# Altium PCB MainBoard.PcbDoc
Units mm, origin at the board's own origin, x right, y up, seen from the top; angles counter-clockwise.
Board outline 90.17 x 83.69 mm, 2 copper layers (Top Layer, Bottom Layer); 19 components, 13 nets, 156 pads, 8 vias.
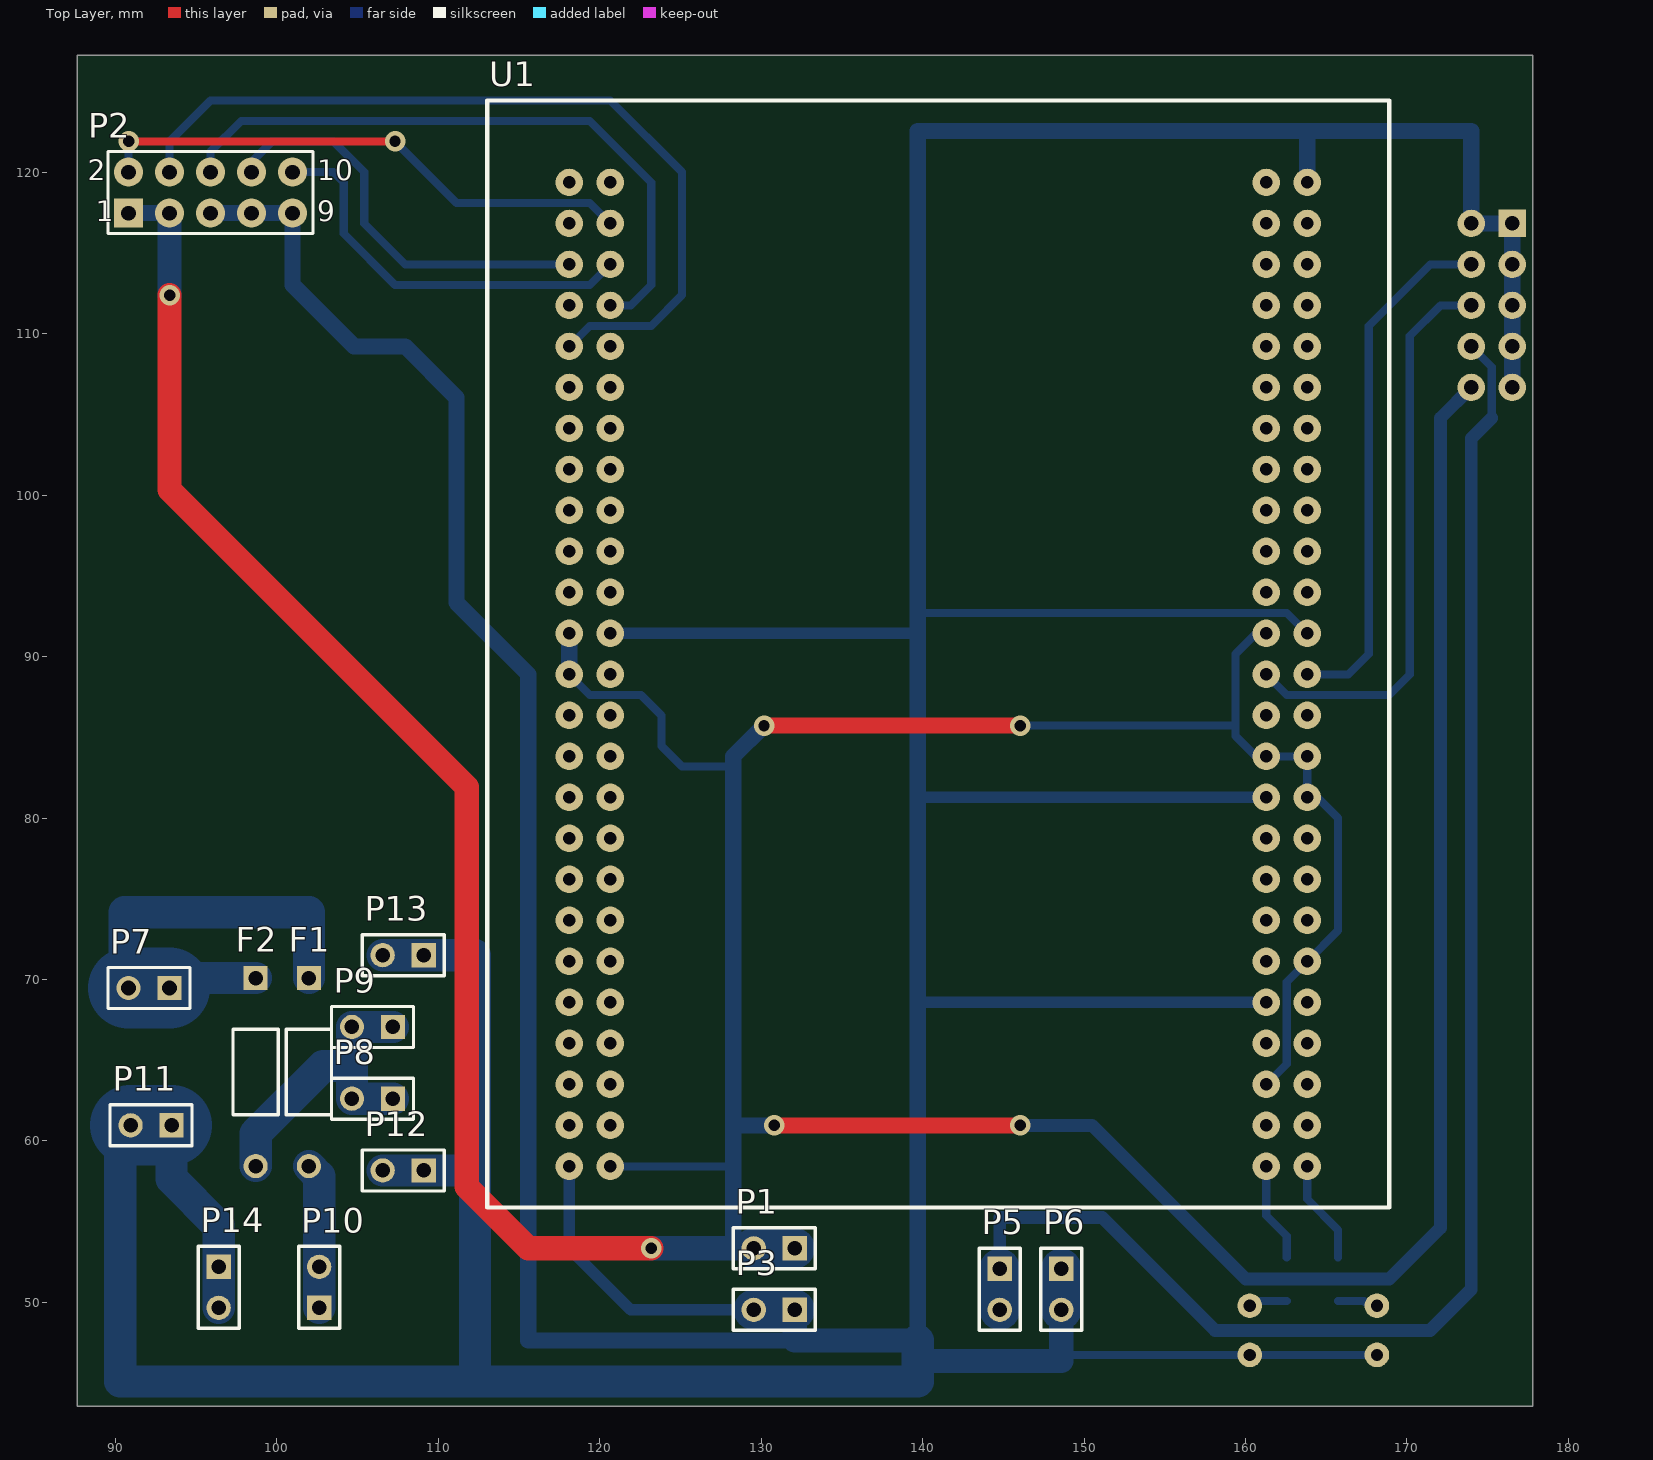
[diagram p0: Top Layer view]
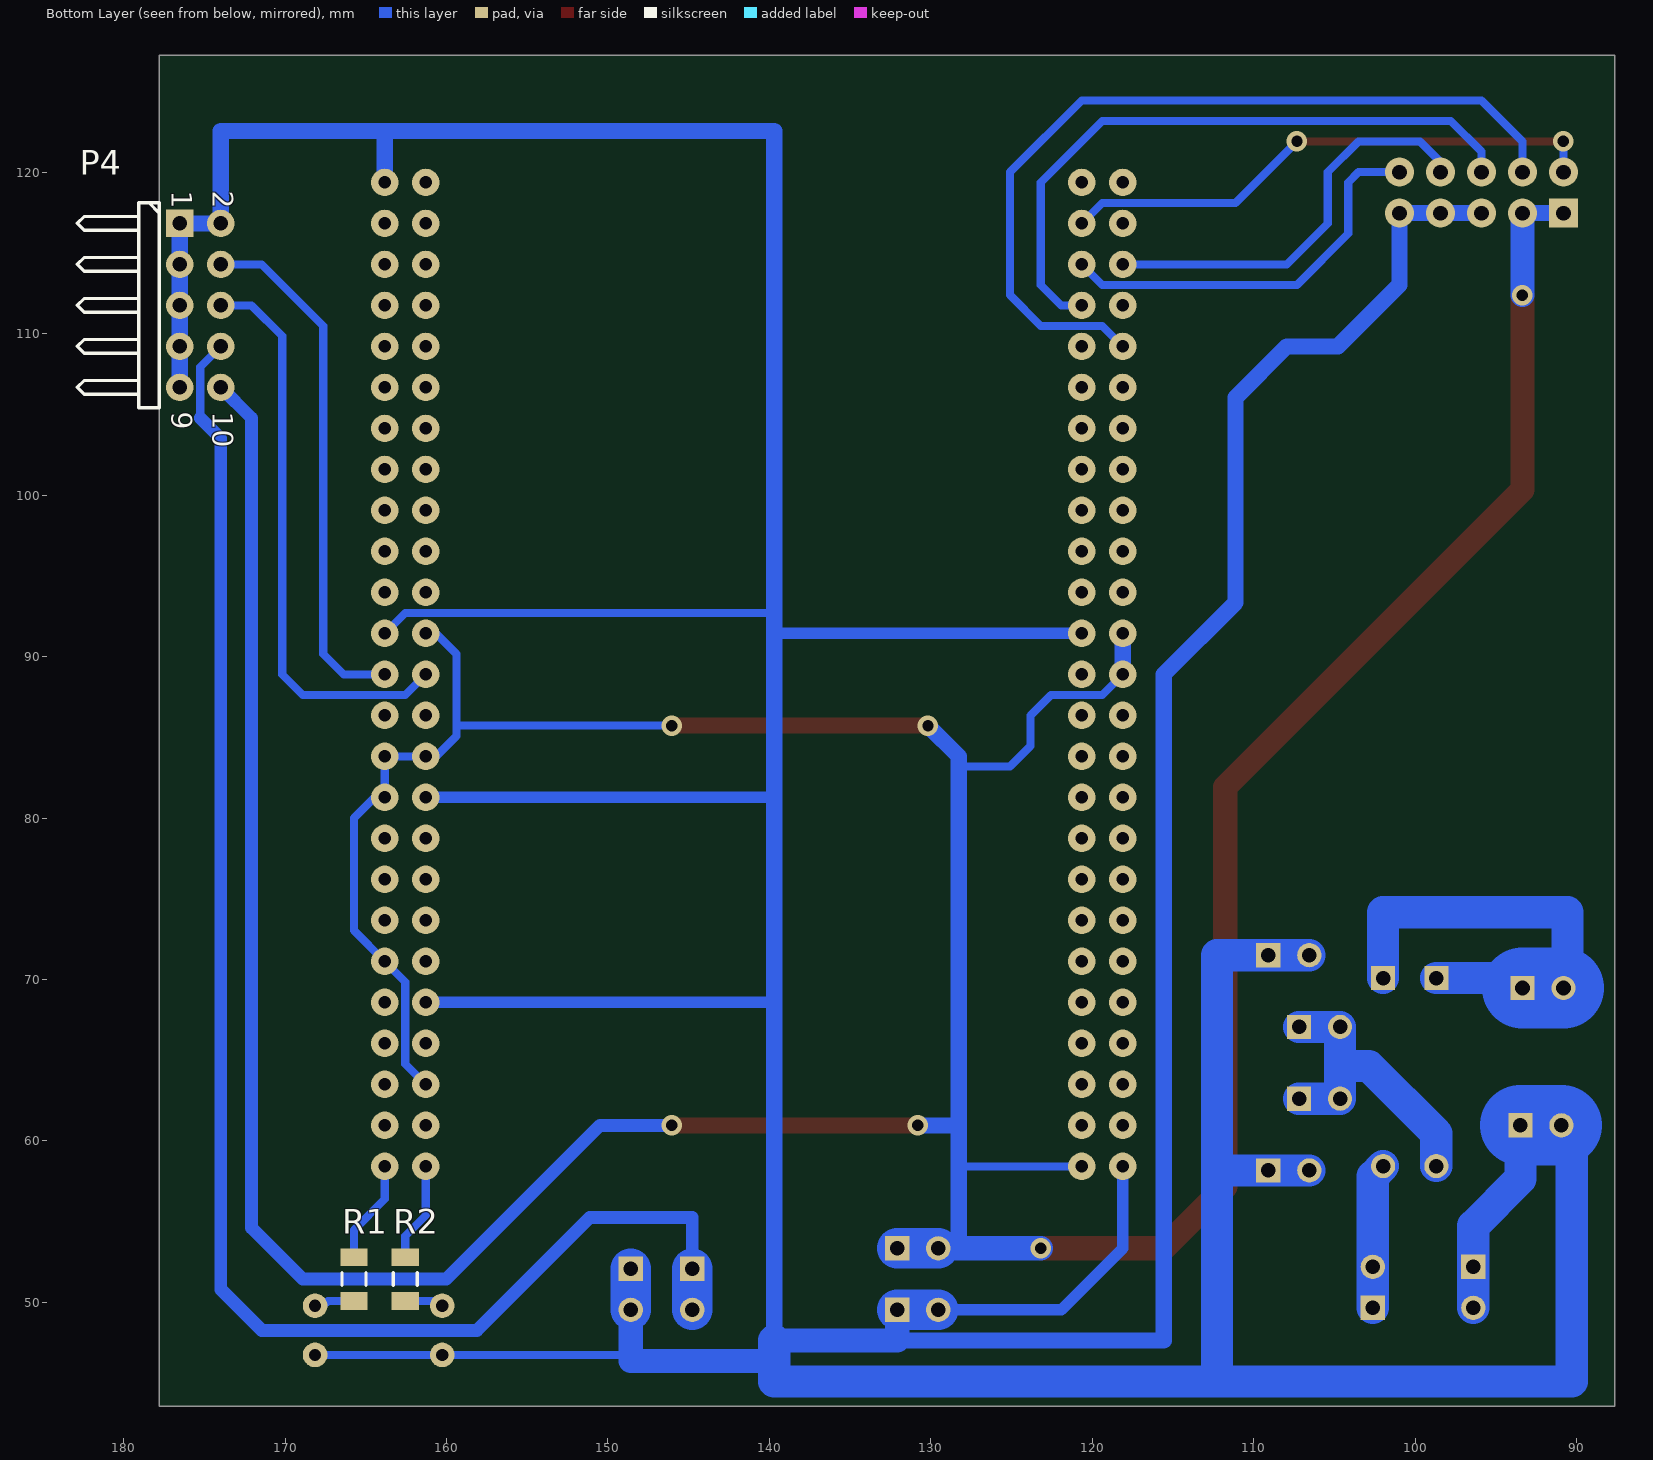
[diagram p1: Bottom Layer view, seen from below]

## Layer stack, top to bottom
Top Solder: solder mask 0.0102, Solder Resist, Dk 3.5
Top Layer: signal copper 0.0356
Dielectric 1: dielectric 0.32, FR-4, Dk 4.8
Bottom Layer: signal copper 0.0356
Bottom Solder: solder mask 0.0102, Solder Resist, Dk 3.5

## Board outline
87.63,43.561 177.8,43.561 177.8,127.25 87.634,127.25 87.63,127.254

## Design rules (kind name [scope] priority, off if disabled: settings)
Clearance Clearance_1 [All] p1: gap=0
Clearance [All vs InNet('GND')] p2: gap=1
ComponentClearance [All] p1: gap=0 collisioncheckmode=3 verticalgap=0 showdistances=FALSE
PolygonConnect [All] p1: connectstyle=Relief reliefconductorwidth=0.254 reliefentries=4 polygonreliefangle="90 Angle" airgapwidth=0.254
RoutingVias [All] p1: holewidth=0.711 width=1.27 viastyle="Through Hole" minholewidth=0.711 minwidth=1.27 maxholewidth=0.711 maxwidth=1.27
SolderMaskExpansion [All] p1: expansion=0.102
Width [All] p1: maxlimit=2539.975 minlimit=0.003 preferedwidth=0.254
29 further rules are at their usual default settings.

## Classes and differential pairs
component class MainBoard: F1 F2 P1 P2 P3 P4 P5 P6 P7 P8 P9 P10 P11 P12 P13 P14 U1

## Components (designator, comment, footprint, x,y, rotation, side; value= is the part's Value field where it differs from the comment)
F1 "Fuse 2" PIN-W2/E2.8 101.981,64.262 r270 top
F2 "Fuse 2" PIN-W2/E2.8 98.679,64.262 r270 top
P1 "Header 2" HDR1X2 132.08,53.34 r180 top
P2 "Header 5X2" HDR2X5 90.805,117.475 r0 top
P3 "Header 2" HDR1X2 132.08,49.53 r180 top
P4 "Header 5X2H" HDR2X5H 176.53,116.84 r270 bottom
P5 "Header 2" HDR1X2 144.78,52.07 r270 top
P6 "Header 2" HDR1X2 148.59,52.07 r270 top
P7 "Header 2" HDR1X2 93.345,69.469 r180 top
P8 "Header 2" HDR1X2 107.188,62.611 r180 top
P9 "Header 2" HDR1X2 107.188,67.056 r180 top
P10 "Header 2" HDR1X2 102.616,49.657 r90 top
P11 "Header 2" HDR1X2 93.472,60.96 r180 top
P12 "Header 2" HDR1X2 109.093,58.166 r180 top
P13 "Header 2" HDR1X2 109.093,71.501 r180 top
P14 "Header 2" HDR1X2 96.393,52.197 r270 top
R1 "Comment" C1206 165.735,51.435 r270 bottom
R2 "Comment" C1206 162.56,51.435 r270 bottom
U1 "STM32F207VCT6_Module" STM32F207VCT6_Module 140.97,88.9 r0 top

## Footprints (in the part's own frame and the unit in brackets; to place one, negate y for a bottom-side part, rotate by r counter-clockwise, add the part's x,y. Pads: shape width x height; smd on the part's side, far side on the other; paste and mask are expansions set on the pad)
C1206 [mm] "Chip Capacitor, Body 3.2x1.6mm, IPC High Density"
  rect 1.1x1.7 smd: 1(-1.35,0) 2(1.35,0)
  silkscreen extent -0.4,-0.75 0.4,0.75, body extent -1.7,-0.9 1.7,0.9, height 1.3
HDR1X2 [mm] "Connector; Header; 2 Position"
  rect 1.5x1.5 hole 0.9: 1(0,0)
  round 1.5 hole 0.9: 2(2.54,0)
  silkscreen extent -1.27,-1.27 3.81,1.27
HDR2X5 [mm] "Connector; Header; 5x2 Position"
  rect 1.8x1.8 hole 0.9: 1(0,0)
  round 1.8 hole 0.9: 2(0,2.54) 3(2.54,0) 4(2.54,2.54) 5(5.08,0) 6(5.08,2.54) 7(7.62,0) 8(7.62,2.54) 9(10.16,0) 10(10.16,2.54)
  silkscreen extent -1.27,-1.27 11.43,3.81
HDR2X5H [mm] "Connector; Header; 5x2 Position; Right Angle"
  rect 1.7x1.7 hole 0.9: 1(0,0)
  round 1.7 hole 0.9: 2(0,2.54) 3(2.54,0) 4(2.54,2.54) 5(5.08,0) 6(5.08,2.54) 7(7.62,0) 8(7.62,2.54) 9(10.16,0) 10(10.16,2.54)
  silkscreen extent -1.27,-6.35 11.43,-1.27
PIN-W2/E2.8 [mm] "Thru-Hole; 2 Leads"
  rect 1.5x1.5 hole 0.9: 1(-5.825,0)
  round 1.5 hole 0.9: 2(5.825,0)
  silkscreen extent -2.65,-1.4 2.65,1.4
STM32F207VCT6_Module [mm]
  round 1.7 hole 0.762: 1(-22.86,30.48) 2(-20.32,30.48) 3(-22.86,27.94) 4(-20.32,27.94) 5(-22.86,25.4) 6(-20.32,25.4) 7(-22.86,22.86) 8(-20.32,22.86) 9(-22.86,20.32) 10(-20.32,20.32) 11(-22.86,17.78) 12(-20.32,17.78) 13(-22.86,15.24) 14(-20.32,15.24) 15(-22.86,12.7) 16(-20.32,12.7) 17(-22.86,10.16) 18(-20.32,10.16) 19(-22.86,7.62) 20(-20.32,7.62) 21(-22.86,5.08) 22(-20.32,5.08) 23(-22.86,2.54) 24(-20.32,2.54) 25(-22.86,0) 26(-20.32,0) 27(-22.86,-2.54) 28(-20.32,-2.54) 29(-22.86,-5.08) 30(-20.32,-5.08) 31(-22.86,-7.62) 32(-20.32,-7.62) 33(-22.86,-10.16) 34(-20.32,-10.16) 35(-22.86,-12.7) 36(-20.32,-12.7) 37(-22.86,-15.24) 38(-20.32,-15.24) 39(-22.86,-17.78) 40(-20.32,-17.78) 41(-22.86,-20.32) 42(-20.32,-20.32) 43(-22.86,-22.86) 44(-20.32,-22.86) 45(-22.86,-25.4) 46(-20.32,-25.4) 47(-22.86,-27.94) 48(-20.32,-27.94) 49(-22.86,-30.48) 50(-20.32,-30.48) 51(20.32,30.48) 52(22.86,30.48) 53(20.32,27.94) 54(22.86,27.94) 55(20.32,25.4) 56(22.86,25.4) 57(20.32,22.86) 58(22.86,22.86) 59(20.32,20.32) 60(22.86,20.32) 61(20.32,17.78) 62(22.86,17.78) 63(20.32,15.24) 64(22.86,15.24) 65(20.32,12.7) 66(22.86,12.7) 67(20.32,10.16) 68(22.86,10.16) 69(20.32,7.62) 70(22.86,7.62) 71(20.32,5.08) 72(22.86,5.08) 73(20.32,2.54) 74(22.86,2.54) 75(20.32,0) 76(22.86,0) 77(20.32,-2.54) 78(22.86,-2.54) 79(20.32,-5.08) 80(22.86,-5.08) 81(20.32,-7.62) 82(22.86,-7.62) 83(20.32,-10.16) 84(22.86,-10.16) 85(20.32,-12.7) 86(22.86,-12.7) 87(20.32,-15.24) 88(22.86,-15.24) 89(20.32,-17.78) 90(22.86,-17.78) 91(20.32,-20.32) 92(22.86,-20.32) 93(20.32,-22.86) 94(22.86,-22.86) 95(20.32,-25.4) 96(22.86,-25.4) 97(20.32,-27.94) 98(22.86,-27.94) 99(20.32,-30.48) 100(22.86,-30.48)
  silkscreen extent -27.94,-33.02 27.94,35.56

## Part data
F1 F2: "Fuse"
P1 P3 P5 P6 P7 P8 P9 P10 P11 P12 P13 P14: "Header, 2-Pin"
P2: "Header, 5-Pin, Dual row"
P4: "Header, 5-Pin, Dual row, Right Angle"

## Free pads (board coordinates)
  round 1.524 hole 0.762: 0(160.274,46.736) 0(160.274,49.784) 1(168.148,46.736) 1(168.148,49.784)

## Via types
v1: diameter 1.27, hole 0.711, Top Layer to Bottom Layer, 8 vias

## Nets (pads, with @x,y where several pads share a name; then routed paths per layer and width w, separated by ;. In a path a pad name is that pad's centre, name@x,y a point inside that pad or via, vN(x,y) a via of type N, cw(c..) or ccw(c..) an arc to the next point about the centre after c; other vN are vias at no path point)
3.3V: P1.1 P1.2 P2.1 P2.3 P4.10 U1.23 U1.25 U1.50 U1.73 U1.79 U1.80 U1.82 U1.90 U1.95 | length 316.3
  Top Layer w1: v1(130.175,85.725) v1(146.05,85.725) ; v1(130.81,60.96) v1(146.05,60.96)
  Top Layer w1.5: v1(93.345,112.395) 93.345,100.33 111.76,81.915 111.76,57.15 115.57,53.34 v1(123.19,53.34)
  Bottom Layer w0.5: U1.25 119.38,87.63 122.555,87.63 123.825,86.36 123.825,84.455 125.095,83.185 128.27,83.185 ; U1.50 128.27,58.42 ; v1(146.05,85.725) 159.385,85.725 ; U1.95 162.56,64.77 162.56,69.85 U1.90 165.735,73.025 165.735,80.01 164.465,81.28 U1.82 U1.80 U1.79 160.655,83.82 159.385,85.09 159.385,85.725 ; U1.73 160.655,91.44 159.385,90.17 159.385,85.725
  Bottom Layer w0.8: v1(146.05,60.96) 150.495,60.96 160.02,51.435 168.91,51.435 172.085,54.61 172.085,104.775 P4.10
  Bottom Layer w1: P2.1 P2.3 ; U1.25 U1.23 ; 128.27,53.34 128.27,58.42 128.27,60.96 ; v1(130.175,85.725) 128.27,83.82 128.27,83.185 128.27,60.96 ; v1(130.81,60.96) 128.27,60.96
  Bottom Layer w1.5: v1(93.345,112.395) P2.3 ; v1(123.19,53.34) 128.27,53.34 P1.2
  Bottom Layer w2.5: P1.2 P1.1
5V: P4.8 P5.1 P5.2 | length 98.3
  Bottom Layer w0.5: P4.8 175.26,107.95 175.26,104.775
  Bottom Layer w0.8: P5.1 144.78,55.245 151.13,55.245 158.115,48.26 171.45,48.26 173.99,50.8 173.99,103.505 175.26,104.775
  Bottom Layer w2.5: P5.2 P5.1
GND: P2.5 P2.7 P2.9 P3.1 P3.2 P4.1 P4.2 P4.3 P4.5 P4.7 P4.9 P6.1 P6.2 P11.1 P11.2 P12.1 P12.2 P13.1 P13.2 P14.1 P14.2 pad.0@160.274,46.736 pad.1@168.148,46.736 U1.24 U1.49 U1.52 U1.74 U1.81 U1.91 | length 502.4
  Bottom Layer w0.5: 139.7,92.71 162.56,92.71 U1.74 ; 148.59,46.736 160.274,46.736 pad.1@168.148,46.736
  Bottom Layer w0.7: U1.49 118.11,53.34 121.92,49.53 P3.2 ; U1.24 139.7,91.44 ; 139.7,68.834 139.954,68.58 U1.91 ; 139.7,81.28 U1.81
  Bottom Layer w1: P2.5 P2.7 P2.9 100.965,113.03 104.775,109.22 107.95,109.22 111.125,106.045 111.125,93.345 115.57,88.9 115.57,47.625 132.08,47.625 ; 139.7,47.625 139.7,68.834 139.7,81.28 139.7,91.44 139.7,92.71 139.7,122.555 163.83,122.555 ; U1.52 163.83,122.555 ; P4.9 P4.7 P4.5 P4.3 P4.1 P4.2 173.99,122.555 163.83,122.555
  Bottom Layer w1.5: P3.1 132.08,47.625 139.7,47.625 ; 139.7,46.355 148.59,46.355 P6.2
  Bottom Layer w2: P11.2 90.297,60.325 90.297,45.085 112.268,45.085 ; P11.1 93.472,57.658 96.393,54.737 P14.1 P14.2 ; P12.2 P12.1 112.268,58.166 ; P13.2 P13.1 112.268,71.501 112.268,58.166 ; 139.7,47.625 139.7,46.355 139.7,45.085 112.268,45.085 ; 112.268,45.085 112.268,58.166
  Bottom Layer w2.5: P3.2 P3.1 ; P6.2 P6.1
  Bottom Layer w5: P11.2 P11.1
NetF1_2: F1.2 P10.1 P10.2 | length 9
  Bottom Layer w2: F1.2 102.616,57.802 P10.2 P10.1
NetF2_2: F2.2 P8.1 P8.2 P9.1 P9.2 | length 19.2
  Bottom Layer w2: F2.2 98.679,60.452 102.87,64.643 104.648,64.643 ; P8.1 P8.2 104.648,64.643 ; P9.1 P9.2 104.648,64.643
TO_SERVO_RX: P4.4 U1.76 | length 32.6
  Bottom Layer w0.5: U1.76 166.37,88.9 167.64,90.17 167.64,110.49 171.45,114.3 P4.4
TO_SERVO_TX: P4.6 U1.75 | length 35.5
  Bottom Layer w0.5: U1.75 162.56,87.63 168.91,87.63 170.18,88.9 170.18,109.855 172.085,111.76 P4.6
TO_WIFI_CTS: P2.4 U1.9 | length 52.5
  Bottom Layer w0.5: P2.4 93.345,121.92 95.885,124.46 120.65,124.46 125.095,120.015 125.095,112.395 123.19,110.49 119.38,110.49 U1.9
TO_WIFI_RESET: P2.2 U1.4 | length 33.9
  Top Layer w0.5: v1(90.805,121.92) v1(107.315,121.92)
  Bottom Layer w0.5: P2.2 v1(90.805,121.92) ; v1(107.315,121.92) 111.125,118.11 119.38,118.11 U1.4
TO_WIFI_RTS: P2.6 U1.8 | length 40.4
  Bottom Layer w0.5: P2.6 95.885,121.285 97.79,123.19 119.38,123.19 123.19,119.38 123.19,113.03 121.92,111.76 U1.8
TO_WIFI_RX: P2.8 U1.5 | length 25.9
  Bottom Layer w0.5: P2.8 98.425,120.65 99.695,121.92 103.505,121.92 105.41,120.015 105.41,116.84 107.95,114.3 U1.5
TO_WIFI_TX: P2.10 U1.6 | length 25
  Bottom Layer w0.5: P2.10 103.505,120.015 104.14,119.38 104.14,116.205 107.315,113.03 119.38,113.03 U1.6
VBAT: F1.1 F2.1 P7.1 P7.2 | length 27.2
  Bottom Layer w2: P7.2@90.551,69.723 90.551,74.168 101.981,74.168 F1.1 ; P7.1@93.963,70.087 F2.1
  Bottom Layer w5: P7.2 P7.1
pads on no net: R1.1 R1.2 R2.1 R2.2 U1.1 U1.2 U1.3 U1.7 U1.10 U1.11 U1.12 U1.13 U1.14 U1.15 U1.16 U1.17 U1.18 U1.19 U1.20 U1.21 U1.22 U1.26 U1.27 U1.28 U1.29 U1.30 U1.31 U1.32 U1.33 U1.34 U1.35 U1.36 U1.37 U1.38 U1.39 U1.40 U1.41 U1.42 U1.43 U1.44 U1.45 U1.46 U1.47 U1.48 U1.51 U1.53 U1.54 U1.55 U1.56 U1.57 U1.58 U1.59 U1.60 U1.61 U1.62 U1.63 U1.64 U1.65 U1.66 U1.67 U1.68 U1.69 U1.70 U1.71 U1.72 U1.77 U1.78 U1.83 U1.84 U1.85 U1.86 U1.87 U1.88 U1.89 U1.92 U1.93 U1.94 U1.96 U1.97 U1.98 U1.99 U1.100
copper on no net: | length 17.5
  Bottom Layer w0.5: 160.274,49.784 160.528,49.784 160.829,50.085 162.56,50.085 ; 161.29,58.42 161.29,55.372 162.56,54.102 162.56,52.785 ; 163.83,58.42 163.83,56.388 165.735,54.483 165.735,52.785 ; 165.735,50.085 167.339,50.085 167.64,49.784 168.148,49.784

## Text inside footprints (layer, text, board x,y; h text height)
P2: Top Overlay "2" at 88.265,119.507 h1.27; Top Overlay "1" at 88.773,116.967 h1.27; Top Overlay "9" at 102.489,116.967 h1.27; Top Overlay "10" at 102.489,119.507 h1.27
P4: Bottom Overlay "2" at 174.498,118.872 h1.27 r90; Bottom Overlay "1" at 177.038,118.872 h1.27 r90; Bottom Overlay "9" at 177.038,105.156 h1.27 r90; Bottom Overlay "10" at 174.498,105.156 h1.27 r90